# Altium PCB Anemoia-ESP32.PcbDoc
Units mm, origin at the board's own origin, x right, y up, seen from the top; angles counter-clockwise.
Board outline 167 x 55 mm, 2 copper layers (Top Layer, Bottom Layer), stack 1.58 mm thick; 17 components, 28 nets, 113 pads, 344 vias.
Unrouted connection lines stored in the file: 8.
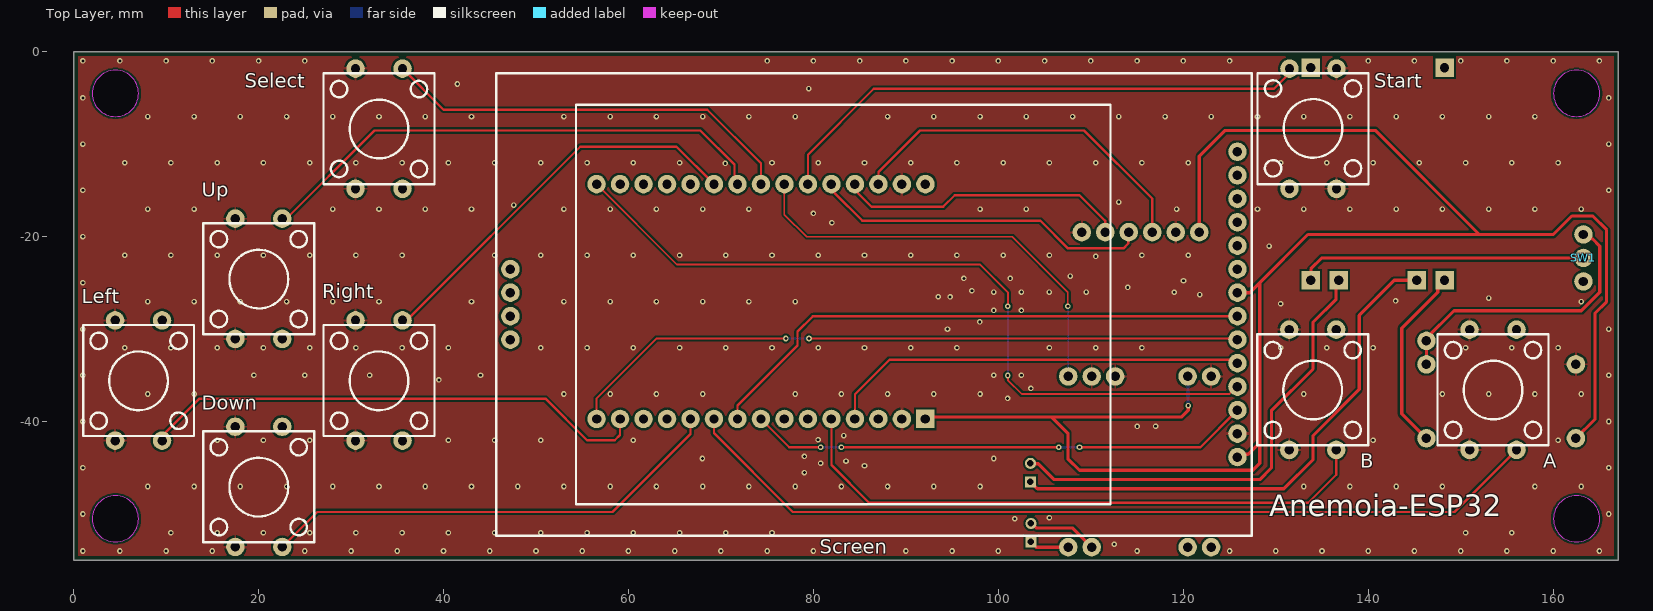
[diagram p0: Top Layer view]
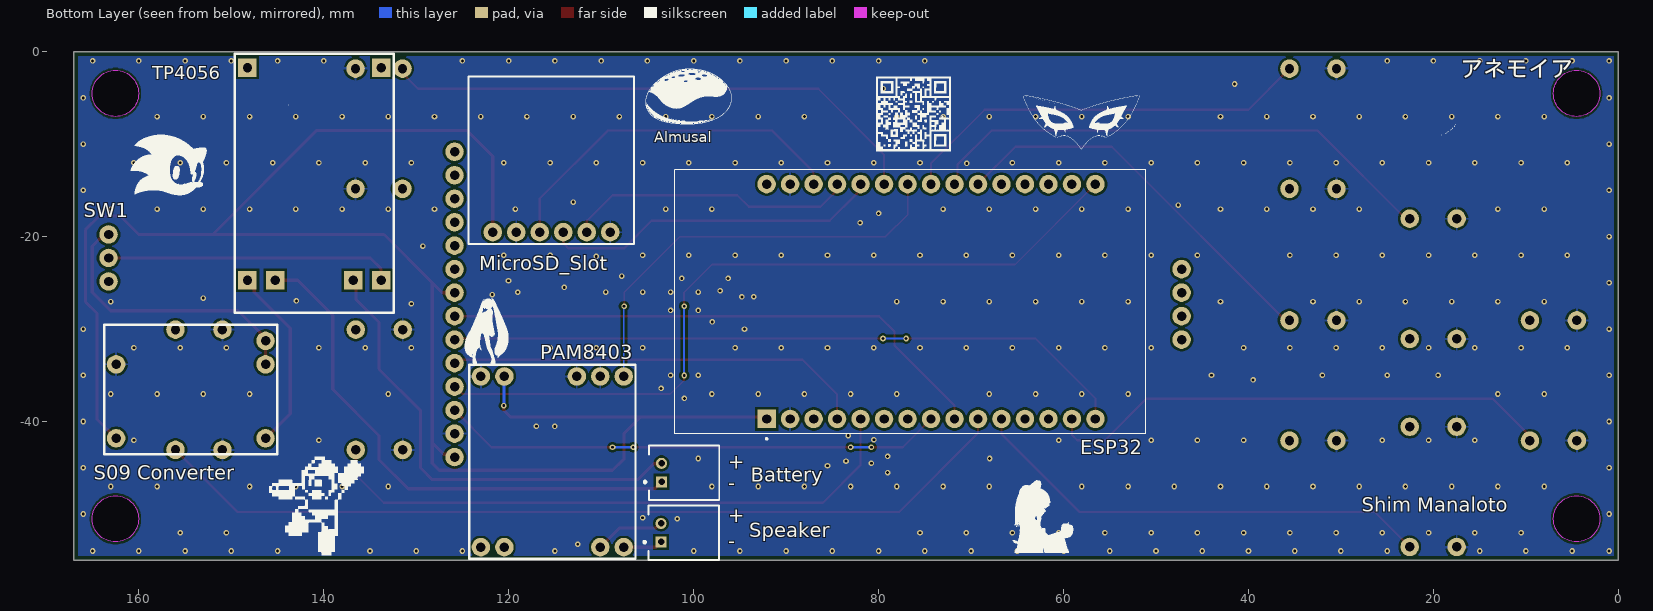
[diagram p1: Bottom Layer view, seen from below]
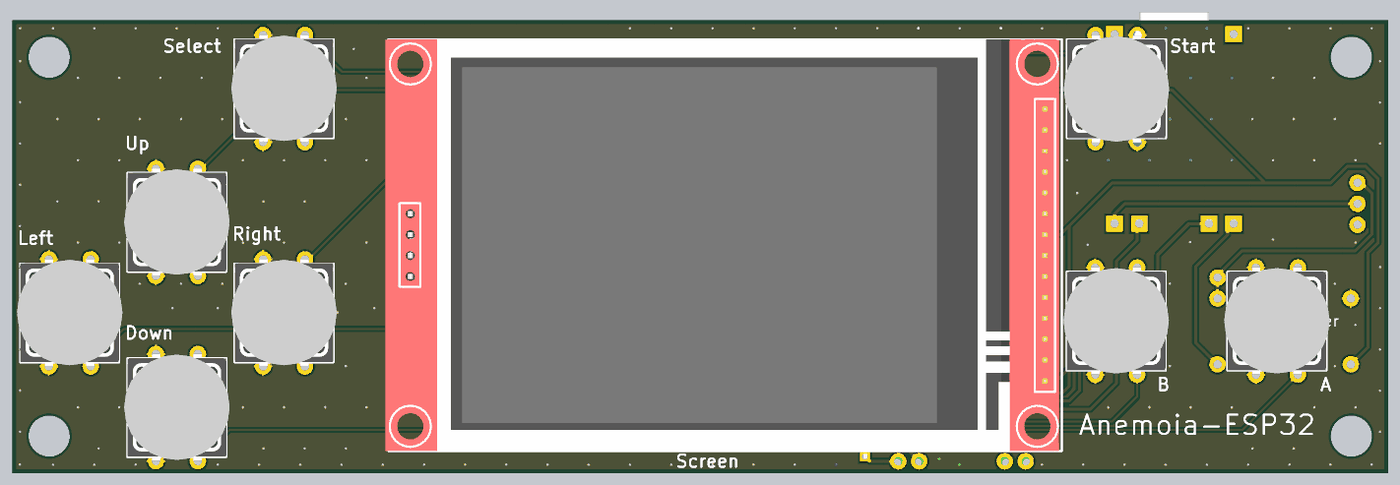
[diagram p2: 3D render of the assembled board from above, using the file's embedded part models]
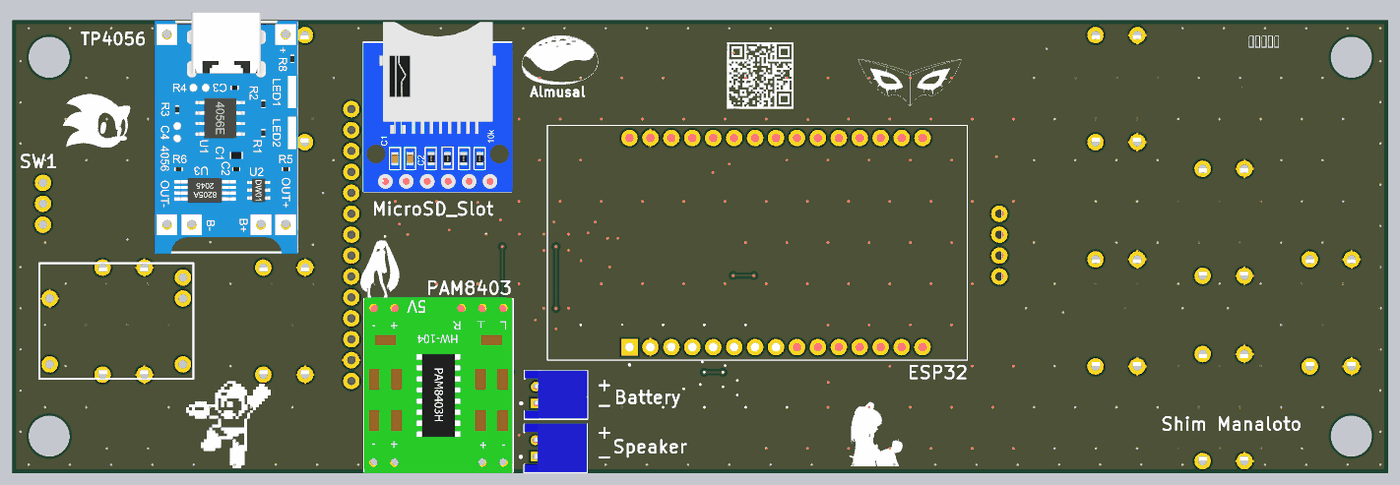
[diagram p3: 3D render of the assembled board from below, using the file's embedded part models]

## Layer stack, top to bottom
Top Solder: solder mask 0.0102, Solder Resist, Dk 3.5
Top Layer: signal copper 0.0356
Dielectric 1: dielectric 1.5086, FR-4, Dk 4.8
Bottom Layer: signal copper 0.0356
Bottom Solder: solder mask 0.0102, Solder Resist, Dk 3.5

## Board outline
0,-55 0,0 167,0 167,-55
cut-out: 2,-4.5 ccw(c4.5,-4.5) 4.5,-7 ccw(c4.5,-4.5) 7,-4.5 ccw(c4.5,-4.5) 4.5,-2 ccw(c4.5,-4.5)
cut-out: 160,-4.5 ccw(c162.5,-4.5) 162.5,-7 ccw(c162.5,-4.5) 165,-4.5 ccw(c162.5,-4.5) 162.5,-2 ccw(c162.5,-4.5)
cut-out: 2,-50.5 ccw(c4.5,-50.5) 4.5,-53 ccw(c4.5,-50.5) 7,-50.5 ccw(c4.5,-50.5) 4.5,-48 ccw(c4.5,-50.5)
cut-out: 160,-50.5 ccw(c162.5,-50.5) 162.5,-53 ccw(c162.5,-50.5) 165,-50.5 ccw(c162.5,-50.5) 162.5,-48 ccw(c162.5,-50.5)

## Design rules (kind name [scope] priority, off if disabled: settings)
Clearance [All] p1: gap=0.254 ignorepadtopadclearanceinfootprint=FALSE except(0: Arc-Hole Track-Hole SMDPad-Hole THPad-Hole Via-Hole Fill-Hole Poly-Hole Region-Hole Text-Hole; 0.1: Arc-Arc Arc-Track Arc-THPad Track-Track Track-THPad; 0.2: Arc-Via Track-Via)
PolygonConnect [All] p1: thpad.connectstyle=Relief thpad.reliefconductorwidth=0.254 thpad.reliefentries=4 thpad.polygonreliefangle="90 Angle" thpad.airgapwidth=0.254 smdpad.connectstyle=Relief smdpad.reliefconductorwidth=0.254 smdpad.reliefentries=4 smdpad.polygonreliefangle="90 Angle" smdpad.airgapwidth=0.254 via.connectstyle=Direct via.reliefconductorwidth=0.254 via.reliefentries=4 via.polygonreliefangle="90 Angle" via.airgapwidth=0.254
RoutingVias [All] p1: holewidth=0.3 width=0.6 viastyle="Through Hole" minholewidth=0.1 minwidth=0.3 maxholewidth=0.711 maxwidth=1.27
SolderMaskExpansion [All] p1: expansion=0.102 istentingtop=FALSE
Width [All] p1: maxlimit=0.5 minlimit=0.1 preferedwidth=0.25 minimp=50.000000 maximp=50.000000 favimp=50.000000
30 further rules are at their usual default settings.

## Components (designator, comment, footprint, x,y, rotation, side; value= is the part's Value field where it differs from the comment)
A "Button" 12X12X7.3MM_TACTILE_PUSH_BUTTON 153.47,-36.54 r0 top
B "Button" 12X12X7.3MM_TACTILE_PUSH_BUTTON 133.97,-36.54 r0 top
Battery "JST PH" JST-S2B-PH-K-S_V 101,-45.5 r90 bottom (schematic designator J2)
Down "Button" 12X12X7.3MM_TACTILE_PUSH_BUTTON 20,-47.04 r0 top
ESP32 "ESP32-DEVKIT-V1" MODULE_ESP32_DEVKIT_V1 76.57,-27 r90 bottom
Left "Button" 12X12X7.3MM_TACTILE_PUSH_BUTTON 7,-35.54 r0 top
MicroSD_Slot "MicroSD_Module" MICROSD_MODULE 116.7,-19.5 r180 bottom
PAM8403 "PAM8403_Module" PAM8403 115.26,-44.33 r90 bottom
Right "Button" 12X12X7.3MM_TACTILE_PUSH_BUTTON 33,-35.54 r0 top
"S09 Converter" "S09_DC_Converter" S09_DC_CONVERTER 154.2,-36.52 r180 bottom
Screen "2.8in_240x320_TFT_ST7789" 2.8IN_240X320_TFT_ST7789 86.52,-27.31 r0 top
Select "Button" 12X12X7.3MM_TACTILE_PUSH_BUTTON 33,-8.31 r0 top
Speaker "JST PH" JST-S2B-PH-K-S_V 101.05,-52 r90 bottom (schematic designator J1)
Start "Button" 12X12X7.3MM_TACTILE_PUSH_BUTTON 134,-8.31 r180 top
SW1 "SPDT Switch" SPDT_Switch 163.25,-22.29 r270 top (schematic designator SW?)
TP4056 "TP4056_Module" TP4056_MODULE 141,-13.2 r270 bottom
Up "Button" 12X12X7.3MM_TACTILE_PUSH_BUTTON 20,-24.54 r0 top

## Footprints (in the part's own frame and the unit in brackets; to place one, negate y for a bottom-side part, rotate by r counter-clockwise, add the part's x,y. Pads: shape width x height; smd on the part's side, far side on the other; paste and mask are expansions set on the pad)
2.8IN_240X320_TFT_ST7789 [mm]
  round 2 hole 1.02: 1(-39.313,-3.81) 2(-39.313,-1.27) 3(-39.313,1.27) 4(-39.313,3.81) 5(39.313,-16.51) 6(39.313,-13.97) 7(39.313,-11.43) 8(39.313,-8.89) 9(39.313,-6.35) 10(39.313,-3.81) 11(39.313,-1.27) 12(39.313,1.27) 13(39.313,3.81) 14(39.313,6.35) 15(39.313,8.89) 16(39.313,11.43) 17(39.313,13.97) 18(39.313,16.51)
  silkscreen extent -40.85,-25 40.85,25, body extent -41.19,-24.99 40.51,25.01, height 6.9
12X12X7.3MM_TACTILE_PUSH_BUTTON [mm]
  round 2 hole 1.02: 1(-2.54,-6.5) 1(-2.54,6.5) 2(2.54,-6.5) 2(2.54,6.5)
  silkscreen extent -6,-6 6,6, body extent -6.4,-6.46 6.4,6.54, height 11.65
JST-S2B-PH-K-S_V [mm] "THD, 2-Leads, Body 7.6x5.9mm, Pitch 2mm"
  rect 1.2x1.2 hole 0.7: 1(-1,2.45)
  round 1.2 hole 0.7: 2(1,2.45)
  silkscreen extent -2.95,-3.8 2.95,4.35, body extent -2.9,-3.8 3,3.8, height 4.8
MICROSD_MODULE [mm]
  round 2 hole 1.02: 1(-5,0) 2(-2.46,0) 3(0.08,0) 4(2.62,0) 5(5.16,0) 6(7.7,0)
  silkscreen extent -7.62,-1.27 10.28,16.83, body extent -7.71,-1.34 10.41,19.28, height 3.38
MODULE_ESP32_DEVKIT_V1 [mm]
  rect 2x2 / inner round 2 / far side rect 2x2 hole 1.02: 1(-12.7,15.515)
  round 2 hole 1.02: 2(-12.7,12.975) 3(-12.7,10.435) 4(-12.7,7.895) 5(-12.7,5.355) 6(-12.7,2.815) 7(-12.7,0.275) 8(-12.7,-2.265) 9(-12.7,-4.805) 10(-12.7,-7.345) 11(-12.7,-9.885) 12(-12.7,-12.425) 13(-12.7,-14.965) 14(-12.7,-17.505) 15(-12.7,-20.045) 16(12.7,-20.045) 17(12.7,-17.505) 18(12.7,-14.965) 19(12.7,-12.425) 20(12.7,-9.885) 21(12.7,-7.345) 22(12.7,-4.805) 23(12.7,-2.265) 24(12.7,0.275) 25(12.7,2.815) 26(12.7,5.355) 27(12.7,7.895) 28(12.7,10.435) 29(12.7,12.975) 30(12.7,15.515)
  silkscreen extent -14.95,-25.48 14.23,25.48
PAM8403 [mm]
  round 2 hole 1.02: 1(-9.23,7.73) 2(-9.23,5.19) 3(-9.23,-5.19) 4(-9.23,-7.73) 5(9.23,-7.73) 6(9.23,-5.19) 7(9.23,-2.65) 8(9.23,5.19) 9(9.23,7.73)
  silkscreen extent -10.5,-9 10.5,9, body extent -10.65,-9 10.65,9, height 2.9
S09_DC_CONVERTER [mm]
  round 2 hole 1.02: 1(-8.23,2.73) 2(-8.23,-5.27) 3(7.93,-5.27) 4(7.93,2.73) 5(7.93,5.27)
  silkscreen extent -9.5,-7 9.2,7
SPDT_Switch [mm]
  round 2 hole 1.02: 1(0,0) 2(-2.54,0) 3(2.54,0)
TP4056_MODULE [mm]
  rect 2x2 hole 1.02: 1(-11.5,7.225) 2(-11.5,-7.225) 3(11.5,-7.225) 4(11.5,-4.225) 5(11.5,4.225) 6(11.5,7.225)
  silkscreen extent -13,-8.6 15,8.6, body extent -14.15,-8.7 15.15,8.7, height 3.64

## Part data
A B Down Left Right Select Start Up: library part 12x12x7.3mm_Tactile_Push_Button
Battery Speaker: library part S2B-PH-K-S(LF)(SN), "CONN HEADER TH R/A 2POS 2mm", Capacitance=10µF, Case/Package=Radial, Color="Natural, White", Contact Resistance=20mΩ, Current Rating=2A, Flammability Rating="UL94 V-0", Insulation Resistance=1GΩ, Manufacturer=JST, Max Operating Temperature=85°C, Max Voltage Rating (AC)=100V, Min Operating Temperature=-25°C, Tolerance=20%, Voltage Rating=50V, Category="Headers and Wire Housings", China RoHS=Compliant, ComponentLink1Description=https://datasheet.octopart.com:443/S2B-PH-K-S%28LF%29%28SN%29-JST-datasheet-180491669.pdf?src-supplier=IHS, ComponentLink1URL=https://datasheet.octopart.com:443/S2B-PH-K-S%28LF%29%28SN%29-JST-datasheet-180491669.pdf?src-supplier=IHS, ComponentLink2Description=https://datasheet.octopart.com:443/S2B-PH-K-S%28LF%29%28SN%29-JST-datasheet-10411123.pdf?src-supplier=Upverter, ComponentLink2URL=https://datasheet.octopart.com:443/S2B-PH-K-S%28LF%29%28SN%29-JST-datasheet-10411123.pdf?src-supplier=Upverter, ComponentLink3Description=https://datasheet.octopart.com:443/S2B-PH-K-S%28LF%29%28SN%29-JST-datasheet-8324864.pdf?src-supplier=Upverter, ComponentLink3URL=https://datasheet.octopart.com:443/S2B-PH-K-S%28LF%29%28SN%29-JST-datasheet-8324864.pdf?src-supplier=Upverter, ComponentLink4Description=https://datasheet.octopart.com:443/S2B-PH-K-S%28LF%29%28SN%29-JST-datasheet-56537.pdf?src-supplier=Upverter, ComponentLink4URL=https://datasheet.octopart.com:443/S2B-PH-K-S%28LF%29%28SN%29-JST-datasheet-56537.pdf?src-supplier=Upverter, ComponentLink5Description=https://datasheet.octopart.com:443/S2B-PH-K-S%28LF%29%28SN%29-JST-datasheet-15068535.pdf?src-supplier=Upverter, ComponentLink5URL=https://datasheet.octopart.com:443/S2B-PH-K-S%28LF%29%28SN%29-JST-datasheet-15068535.pdf?src-supplier=Upverter, ComponentLink6Description=https://datasheet.octopart.com:443/S2B-PH-K-S%28LF%29%28SN%29-JST-datasheet-147762421.pdf?src-supplier=LKR, ComponentLink6URL=https://datasheet.octopart.com:443/S2B-PH-K-S%28LF%29%28SN%29-JST-datasheet-147762421.pdf?src-supplier=LKR, ComponentLink7Description=https://datasheet.octopart.com:443/S2B-PH-K-S%28LF%29%28SN%29-JST-datasheet-12510261.pdf?src-supplier=Future+Electronics, ComponentLink7URL=https://datasheet.octopart.com:443/S2B-PH-K-S%28LF%29%28SN%29-JST-datasheet-12510261.pdf?src-supplier=Future+Electronics, Connector Type="Male Pin", Contact Gender=Male, Contact Material=Brass, Contact Mating Length=3.302mm, Contact Plating=Tin, Depth=7.6mm, Diameter=5mm, Fastening Type=Detent, Gender=Male, Height=11mm, Lead Free="Lead Free", Lead Pitch=2mm, Length=11mm, Lifecycle Status=Production, Manufacturer Part Number=S2B-PH-K-S(LF)(SN), Max Current Rating=2A, Max Voltage Rating (DC)=100V, Mount="Through Hole", Number of Contacts=2, Number of Pins=2, Number of Poles=2, Number of Positions=2, Number of Rows=1, Orientation="Right Angle", Packaging=Bulk, Pitch=2mm, Radiation Hardening=No, REACH SVHC=Yes, RoHS=Compliant, Stock 1=15836, Supplier 1="Arrow Electronics", Terminal Pitch=2mm, Termination=Solder, Voltage Rating (AC)=100V, Voltage Rating (DC)=50V, Weight=28.349523g, Width=4.5mm, Working Voltage=100V
ESP32: "Dual core, Wi-Fi: 2.4 GHz up to 150 Mbits/s,BLE (Bluetooth Low Energy) and legacy Bluetooth, 32 bits, Up to 240 MHz", Package=None, Check_prices=https://www.snapeda.com/parts/ESP32-DEVKIT-V1/Do+it/view-part/?ref=eda, MF="Do it", MP=ESP32-DEVKIT-V1, SnapEDA_Link=https://www.snapeda.com/parts/ESP32-DEVKIT-V1/Do+it/view-part/?ref=snap
MicroSD_Slot: "3.3V MicroSD Module"

## Via types
v1: diameter 0.6, hole 0.3, Top Layer to Bottom Layer, tented both sides, 344 vias

## Nets (pads, with @x,y where several pads share a name; then routed paths per layer and width w, separated by ;. In a path a pad name is that pad's centre, name@x,y a point inside that pad or via, vN(x,y) a via of type N, cw(c..) or ccw(c..) an arc to the next point about the centre after c; other vN are vias at no path point)
+3V3: "S09 Converter.2" ESP32.1 MicroSD_Slot.1 PAM8403.8 Screen.5 Screen.12 | length 194.1
  Top Layer w0.35: ESP32.1 92.285,-39.5 105.75,-39.5 ; v1(120.5,-38.25) 120.5,-38.75 119.75,-39.5 105.75,-39.5 ; MicroSD_Slot.1 121.7,-11.3 124.5,-8.5 140.75,-8.5 152,-19.75 ; Screen.5 126.137,-43.515 126.985,-43.515 128.25,-42.25 ; Screen.12 127.16,-26.04 128.25,-24.95 ; 162.43,-41.79 164.5,-39.72 164.5,-28.25 165.75,-27 165.75,-19.25 164.25,-17.75 162,-17.75 160,-19.75 152,-19.75 ; 105.75,-39.5 107.5,-41.25 107.5,-44 108.75,-45.25 127.5,-45.25 128.25,-44.5 128.25,-42.25 ; 128.25,-42.25 128.25,-24.95 ; 128.25,-24.95 133.45,-19.75 152,-19.75
  Bottom Layer w0.35: PAM8403.8@120.475,-35.125 120.475,-38.225 v1(120.5,-38.25)
D2: ESP32.4 Screen.9 | length 46
  Top Layer w0.25: ESP32.4 84.465,-37.035 88.2,-33.3 125.395,-33.3 125.755,-33.66 Screen.9@126.1,-33.66
D4: B.2 ESP32.5 | length 65.2
  Top Layer w0.25: ESP32.5 81.925,-44.675 86,-48.75 133.5,-48.75 136.51,-45.74 B.2@136.51,-43.04
D5: ESP32.8 Screen.7 | length 54.6
  Top Layer w0.25: ESP32.8 74.45,-39.7 ESP32.8@74.5,-39.75 ; ESP32.8@74.378,-39.773 77.355,-42.75 v1(80.75,-42.75) ; v1(83,-42.75) v1(106.5,-42.75) ; v1(108.75,-42.75) 121.823,-42.75 Screen.7
  Bottom Layer w0.25: v1(80.75,-42.75) v1(83,-42.75) ; v1(106.5,-42.75) v1(108.75,-42.75)
D12: ESP32.27 MicroSD_Slot.5 | length 31.4
  Top Layer w0.25: ESP32.27 84.8,-14.635 84.8,-15.3 86.25,-16.75 94,-16.75 95.25,-15.5 108.75,-15.5 111.521,-18.271 111.521,-19.481 MicroSD_Slot.5
D13: ESP32.28 MicroSD_Slot.3 | length 39.5
  Top Layer w0.25: ESP32.28 87.005,-12.995 91.5,-8.5 109.25,-8.5 116.62,-15.87 MicroSD_Slot.3
D14: ESP32.26 MicroSD_Slot.4 | length 36.8
  Top Layer w0.25: ESP32.26 82.26,-14.635 82.26,-15.26 85.25,-18.25 104.5,-18.25 107.5,-21.25 113.5,-21.25 114.021,-20.729 114.021,-19.559 MicroSD_Slot.4
D18: ESP32.9 Screen.11 | length 60.4
  Top Layer w0.25: ESP32.9 71.765,-38.235 78.25,-31.75 78.25,-30.25 79.92,-28.58 Screen.11
D19: A.2 ESP32.10 | length 94.6
  Top Layer w0.25: ESP32.10 69.225,-41.225 77.75,-49.75 149.3,-49.75 A.2@156.01,-43.04
D21: Down.2 ESP32.11 | length 50.1
  Top Layer w0.25: Down.2@23.04,-53.04 26.33,-49.75 58.25,-49.75 66.685,-41.315 ESP32.11
D22: ESP32.14 Left.2 | length 55
  Top Layer w0.25: Left.2@9.54,-41.54 13.58,-37.5 51,-37.5 55.5,-42 58.5,-42 59.065,-41.435 ESP32.14
D23: ESP32.15 Screen.10 | length 74.2
  Top Layer w0.2: ESP32.15 56.525,-37.475 63,-31 v1(77,-31) ; v1(79.5,-31) 125.635,-31 Screen.10@125.755,-31.12
  Bottom Layer w0.25: v1(77,-31) v1(79.5,-31)
D25: ESP32.23 Select.2 | length 45.3
  Top Layer w0.25: Select.2@35.54,-1.81 39.98,-6.25 68.5,-6.25 74.305,-12.055 ESP32.23
D26: ESP32.24 PAM8403.5 | length 46.5
  Top Layer w0.15: ESP32.24 76.845,-17.595 79.25,-20 101.5,-20 107.5,-26 v1(107.5,-27.5)
  Bottom Layer w0.15: v1(107.5,-27.5) 107.515,-27.515 PAM8403.5@107.515,-35.085
D27: ESP32.25 Start.2 | length 59.1
  Top Layer w0.25: ESP32.25@79.385,-14.482 79.385,-11.115 86.5,-4 129.77,-4 Start.2@131.46,-2.31
D32: ESP32.21 Right.2 | length 43.7
  Top Layer w0.25: Right.2@35.54,-29.475 54.765,-10.25 65.175,-10.25 ESP32.21 ; Right.2@36.04,-29.475 Right.2@36.385,-29.475
D33: ESP32.22 Up.2 | length 56.8
  Top Layer w0.25: Up.2@22.54,-18.475 32.515,-8.5 67.75,-8.5 71.435,-12.185 71.435,-13.97 ESP32.22
EN: ESP32.16 Screen.8 | length 84.6
  Top Layer w0.2: ESP32.16 65.225,-23 98,-23 101,-26 v1(101,-27.5) ; v1(101,-35) 101,-35.5 102.5,-37 124.955,-37 125.755,-36.2 Screen.8
  Bottom Layer w0.2: v1(101,-35) v1(101,-27.5)
GND: "S09 Converter.1" A.1 B.1 Down.1 ESP32.2 ESP32.29 Left.1 MicroSD_Slot.2 MicroSD_Slot.6 PAM8403.6 PAM8403.7 PAM8403.9 Right.1 Screen.6 Select.1 Start.1 Up.1
  other v1: 0.975,-53.975 4.975,-53.975 9.975,-53.975 14.975,-53.975 24.975,-53.975 29.975,-53.975 34.975,-53.975 39.975,-53.975 44.975,-53.975 49.975,-53.975 54.975,-53.975 59.975,-53.975 64.975,-53.975 69.975,-53.975 74.975,-53.975 79.975,-53.975 84.975,-53.975 89.975,-53.975 94.975,-53.975 99.975,-53.975 114.975,-53.975 124.975,-53.975 129.975,-53.975 134.975,-53.975 139.975,-53.975 144.975,-53.975 149.975,-53.975 154.975,-53.975 159.975,-53.975 164.975,-53.975 112.5,-53.25 10.5,-52 15.5,-52 20.5,-52 25.5,-52 30.5,-52 35.5,-52 40.5,-52 45.5,-52 50.5,-52 55.5,-52 60.5,-52 65.5,-52 70.5,-52 75.5,-52 150.5,-52 155.5,-52 101.75,-50.5 105.5,-50.375 0.975,-49.975 165.975,-49.975 8,-47 13,-47 18,-47 23,-47 28,-47 33,-47 38,-47 43,-47 48,-47 53,-47 58,-47 63,-47 68,-47 73,-47 78,-47 83,-47 88,-47 93,-47 98,-47 133,-47 138,-47 143,-47 148,-47 158,-47 163,-47 79,-45.5 0.975,-44.975 165.975,-44.975 85.5,-44.75 80.75,-44.5 83.5,-44.25 67.975,-43.975 99.475,-43.975 79,-43.75 15.5,-42 20.5,-42 25.5,-42 40.5,-42 45.5,-42 50.5,-42 60.5,-42 140.5,-42 160.5,-42 80.48,-41.94 83.25,-41.5 115,-40.5 116.975,-40.475 0.975,-39.975 165.975,-39.975 100.975,-37.475 8,-37 13,-37 53,-37 58,-37 63,-37 68,-37 78,-37 83,-37 88,-37 93,-37 98,-37 133,-37 148,-37 153,-37 158,-37 163,-37 103.5,-36.4 39.475,-35.475 0.975,-34.975 19.475,-34.975 24.975,-34.975 31.975,-34.975 43.975,-34.975 99.475,-34.975 102.475,-34.975 165.975,-34.975 5.5,-32 10.5,-32 15.5,-32 20.5,-32 25.5,-32 30.5,-32 35.5,-32 40.5,-32 50.5,-32 55.5,-32 60.5,-32 65.5,-32 70.5,-32 75.5,-32 80.5,-32 85.5,-32 90.5,-32 95.5,-32 105.5,-32 110.5,-32 115.5,-32 130.5,-32 135.5,-32 140.5,-32 150.5,-32 155.5,-32 160.5,-32 0.975,-29.975 94.475,-29.975 165.975,-29.975 97.975,-29.205 99.475,-27.955 102.475,-27.955 130.5,-27.25 8,-27 13,-27 18,-27 23,-27 28,-27 33,-27 43,-27 53,-27 58,-27 63,-27 68,-27 73,-27 78,-27 163,-27 142.935,-26.935 153,-26.625 94.75,-26.5 93.475,-26.475 121.75,-26.25 119,-26 99.475,-25.975 102.475,-25.975 105.475,-25.975 109.475,-25.975 97.114,-25.822 113.975,-25.475 0.975,-24.975 120,-24.75 96.25,-24.5 101.25,-24.5 107.75,-24.25 110.5,-22.125 5.5,-22 10.5,-22 15.5,-22 20.5,-22 25.5,-22 30.5,-22 35.5,-22 45.5,-22 50.5,-22 55.5,-22 60.5,-22 65.5,-22 70.5,-22 75.5,-22 80.5,-22 85.5,-22 90.5,-22 95.5,-22 100.5,-22 105.5,-22 115.5,-22 120.5,-22 129.25,-21 0.975,-19.975 81.975,-18.475 79.975,-17.475 8,-17 13,-17 28,-17 33,-17 38,-17 43,-17 53,-17 58,-17 63,-17 68,-17 73,-17 98,-17 103,-17 119.25,-17 128,-17 133,-17 138,-17 143,-17 148,-17 153,-17 158,-17 163,-17 47.566,-16.566 113,-16.25 0.975,-14.975 165.975,-14.975 70.433,-12.067 5.5,-12 10.5,-12 15.5,-12 20.5,-12 25.5,-12 30.5,-12 35.5,-12 40.5,-12 45.5,-12 50.5,-12 55.5,-12 60.5,-12 65.5,-12 75.5,-12 80.5,-12 85.5,-12 90.5,-12 95.5,-12 100.5,-12 105.5,-12 110.5,-12 115.5,-12 120.5,-12 130.5,-12 135.5,-12 140.5,-12 145.5,-12 150.5,-12 155.5,-12 160.5,-12 0.975,-9.975 165.975,-9.975 8,-7 13,-7 18,-7 23,-7 28,-7 33,-7 38,-7 43,-7 53,-7 58,-7 63,-7 68,-7 73,-7 78,-7 88,-7 93,-7 98,-7 103,-7 108,-7 113,-7 118,-7 123,-7 128,-7 133,-7 138,-7 143,-7 148,-7 153,-7 158,-7 0.975,-4.975 165.975,-4.975 79.475,-3.975 41.475,-3.475 0.975,-0.975 4.975,-0.975 9.975,-0.975 14.975,-0.975 19.975,-0.975 24.975,-0.975 74.975,-0.975 79.975,-0.975 84.975,-0.975 89.975,-0.975 94.975,-0.975 99.975,-0.975 104.975,-0.975 109.975,-0.975 114.975,-0.975 119.975,-0.975 124.975,-0.975 139.975,-0.975 144.975,-0.975 149.975,-0.975 154.975,-0.975 159.975,-0.975 164.975,-0.975
NetPAM8403_3: PAM8403.3 Speaker.2 | length 7.6
  Top Layer w0.35: Speaker.2 103.621,-51 104.121,-51.5 108.01,-51.5 PAM8403.3
NetPAM8403_4: PAM8403.4 Speaker.1 | length 4.3
  Top Layer w0.35: Speaker.1 104.06,-53.56 PAM8403.4
  Bottom Layer w0.25: PAM8403.4@107.515,-53.545 PAM8403.4
NetTP4056_1: TP4056.1
NetTP4056_2: TP4056.2
OUT+: SW1.1 TP4056.6 | length 31.2
  Top Layer w0.35: TP4056.6 133.779,-24.696 133.779,-23.471 134.96,-22.29 SW1.1
VBAT+: Battery.2 TP4056.5 | length 50.6
  Top Layer w0.35: Battery.2 103.496,-44.545 104.295,-44.545 106,-46.25 128.25,-46.25 129.5,-45 129.5,-38.8 134,-34.3 134,-29.25 136.5,-26.75 136.5,-24.975 TP4056.5
VBAT-: Battery.1 TP4056.4 | length 57.6
  Top Layer w0.35: Battery.1 104.2,-47.25 130.85,-47.25 134,-44.1 134,-41.5 139,-36.5 139,-28.5 142.8,-24.7 TP4056.4
VIN+: "S09 Converter.4" "S09 Converter.5" SW1.2 | length 30.9
  Top Layer w0.35: 146.27,-33.79 146.27,-31.25 146.27,-30.98 149.25,-28 163,-28 165,-26 165,-21 164.228,-20.228 164.175,-20.228 163.696,-19.75 SW1.2
VIN-: "S09 Converter.3" TP4056.3 | length 20.1
  Top Layer w0.35: 146.25,-41.79 143.6,-39.14 143.6,-29.9 147.491,-26.009 147.491,-25.434 TP4056.3
pads on no net: ESP32.3 ESP32.6 ESP32.7 ESP32.12 ESP32.13 ESP32.17 ESP32.18 ESP32.19 ESP32.20 ESP32.30 PAM8403.1 PAM8403.2 Screen.1 Screen.2 Screen.3 Screen.4 Screen.13 Screen.14 Screen.15 Screen.16 Screen.17 Screen.18 SW1.3

## Polygon pours and split planes (outlines as drawn)
GND on Bottom Layer "GND_L02_P003" (solid, pour order 3): 0.5,-0.5 0.5,-54.5 166.5,-54.5 166.5,-0.5
GND on Top Layer "GND_L01_P004" (solid, remove dead copper, pour order 4): 0.5,-0.5 0.5,-54.5 166.5,-54.5 166.5,-0.5

## Silkscreen, mask and mechanical layers (free items; w line width, h text height)
Top Overlay:
  text "Anemoia-ESP32" at 129.254,-50.246 h2.35
Bottom Overlay:
  drawing of 115 lines, arcs and shapes, not listed
  text "アネモイア" at 17,-3.311 h3.05
  text "Almusal" at 104.25,-9.75 h1.14
  text "+" at 96.246,-43.75 h1.52 r180
  text "-" at 96.246,-46.242 h1.52 r180
  text "+" at 96.246,-49.5 h1.52 r180
  text "Shim Manaloto" at 27.746,-49.746 h1.52
  text "-" at 96.246,-52.492 h1.52 r180
Mechanical 1:
  circle w0.254: c162.5,-4.5 r2.5
  circle w0.254: c4.5,-50.5 r2.5
  circle w0.254: c4.5,-4.5 r2.5
  circle w0.254: c162.5,-50.5 r2.5
  lines w0.254: 0,-55 167,-55 167,0 0,0 0,-55